# Altium PCB CT310高端控制盒核心板电路V1.3.PcbDoc (part 5 of 10)
Units mil, origin at the board's own origin, x right, y up, seen from the top; angles counter-clockwise.
Board outline 3735.76 x 4625 mil, 2 copper layers (TOP, BOTTOM), stack 10.4 mil thick; 198 components, 362 nets, 1085 pads, 352 vias.
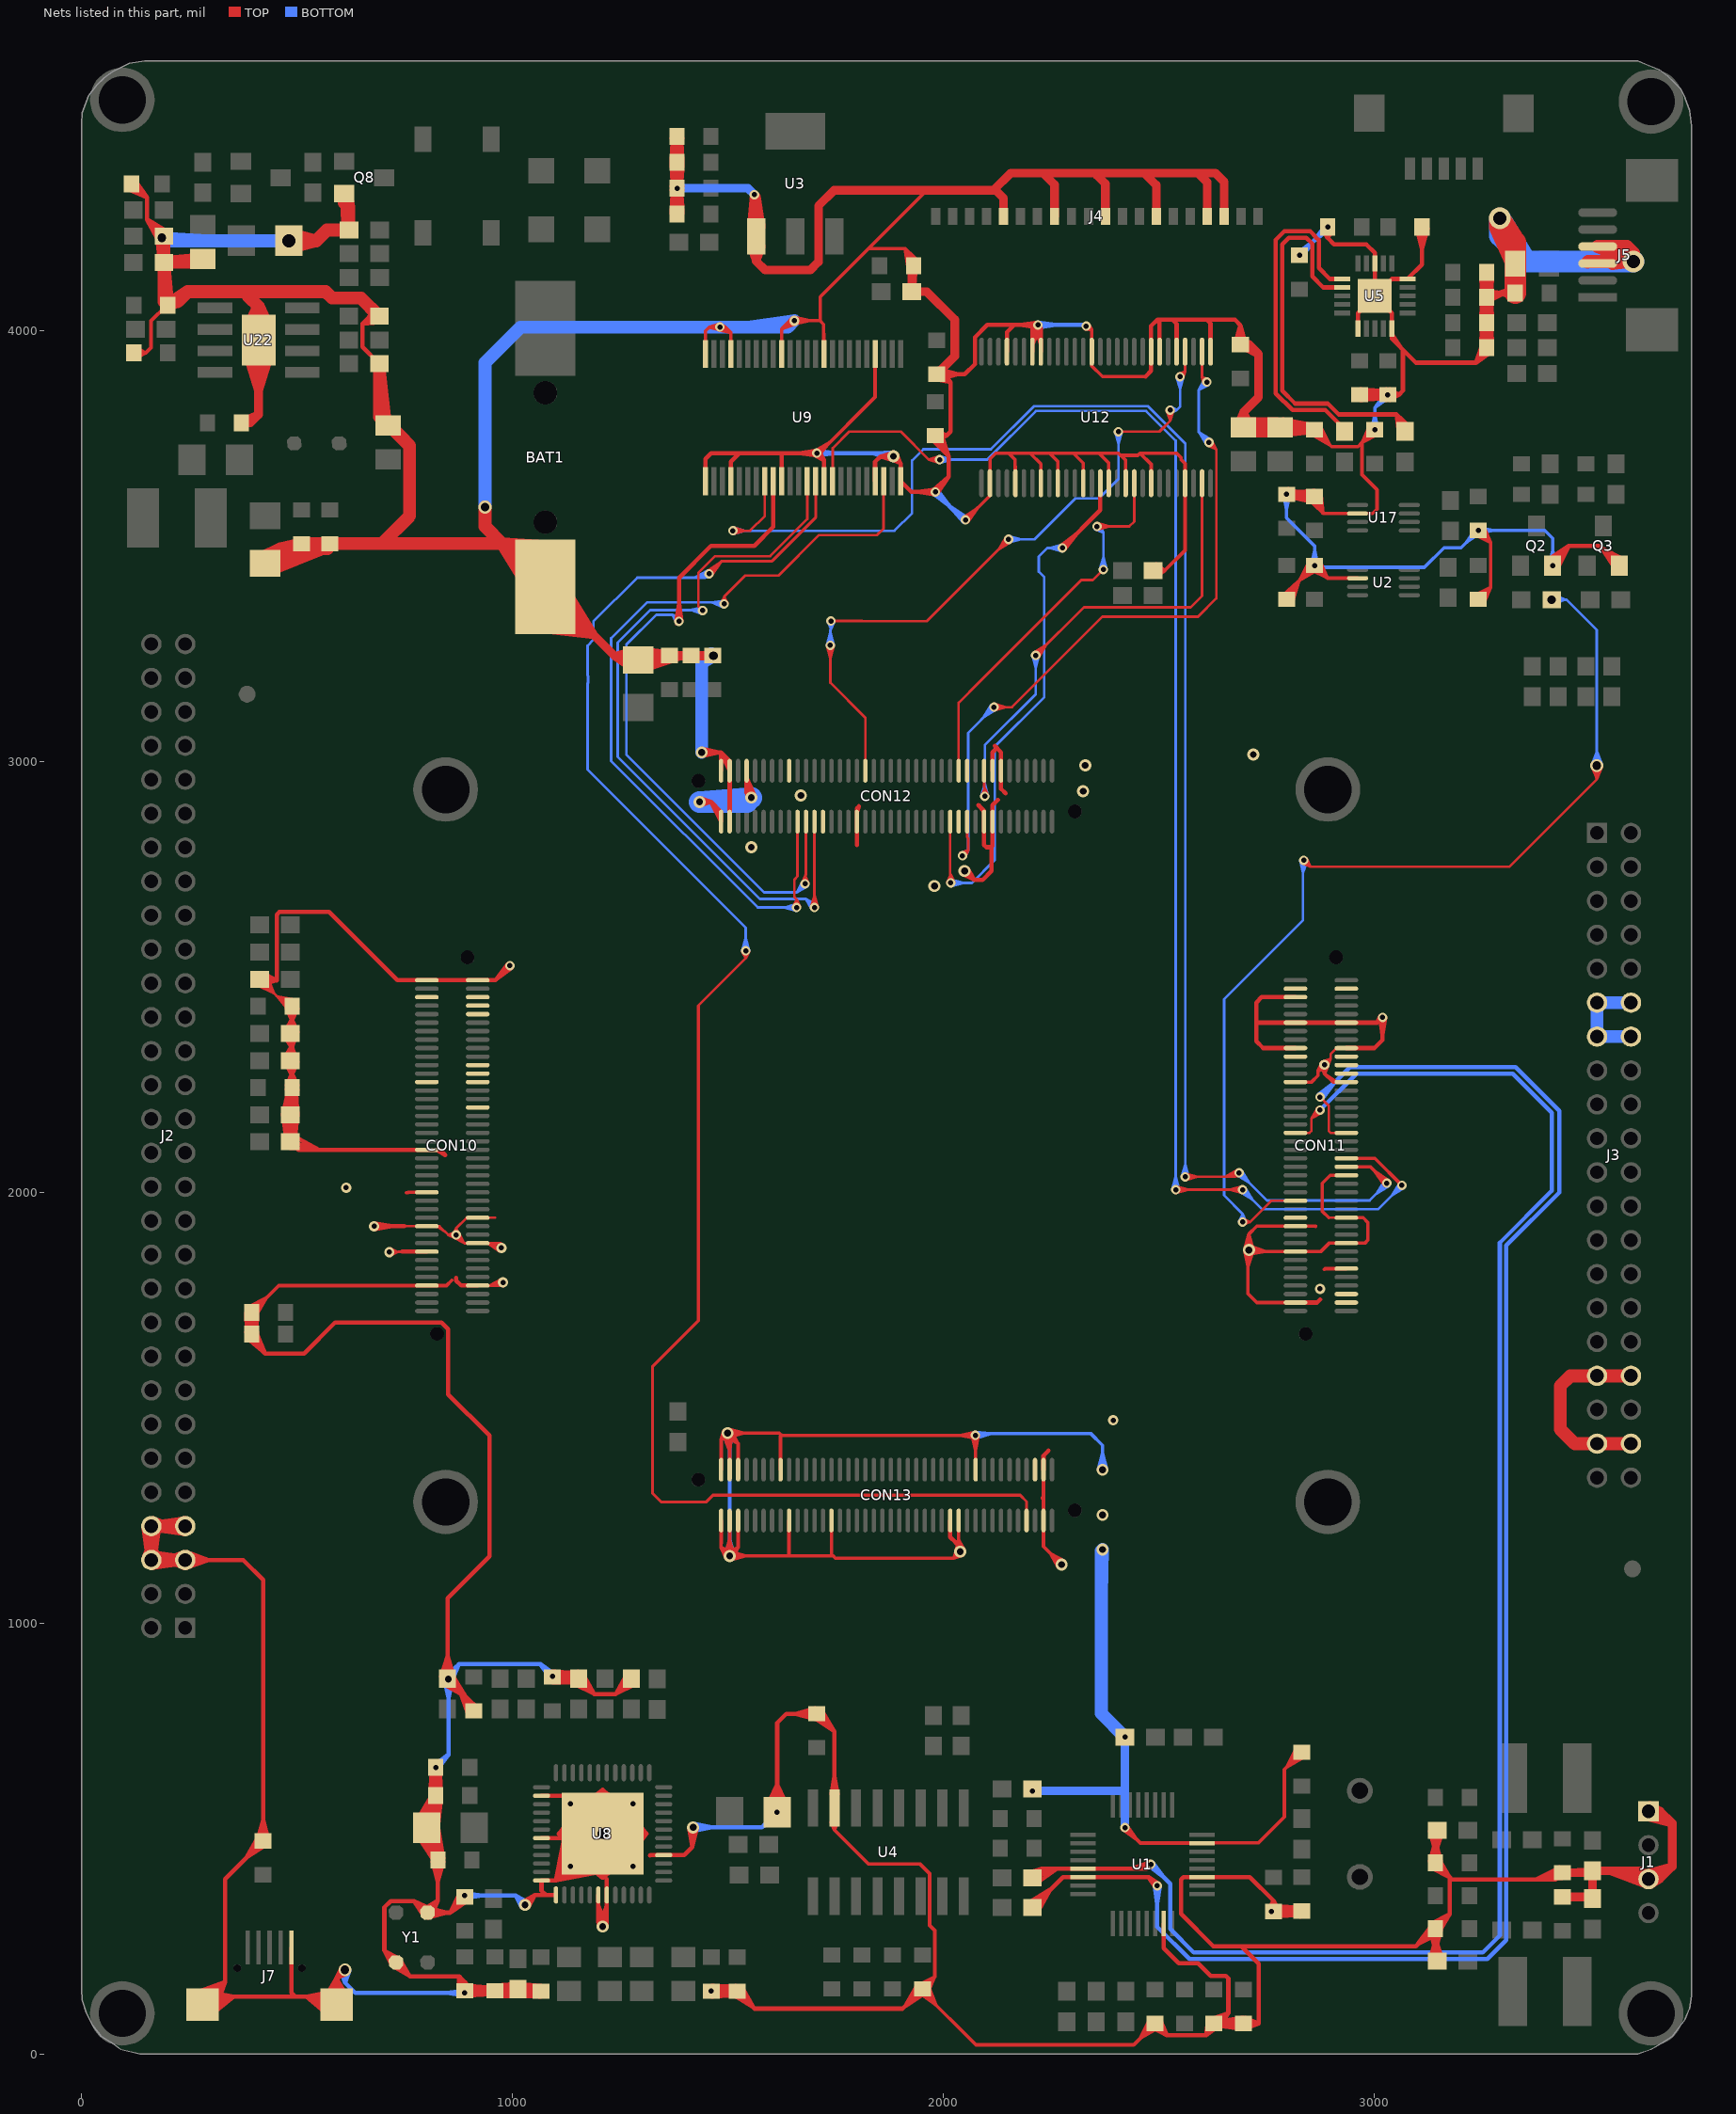
[diagram p5: the nets of this part, all layers, seen from the top]

## Via types
v1: diameter 22, hole 12, TOP to BOTTOM, tented both sides, 177 vias
v2: diameter 22, hole 12, TOP to BOTTOM, 89 vias
v3: diameter 28, hole 16, TOP to BOTTOM, 37 vias
v4: diameter 30, hole 20, TOP to BOTTOM, tented both sides, 26 vias
v5: diameter 24, hole 12, TOP to BOTTOM, 17 vias
v6: diameter 50, hole 30, TOP to BOTTOM, tented both sides, 5 vias
v7: diameter 40, hole 24, TOP to BOTTOM, 1 vias

## Nets (pads, with @x,y where several pads share a name; then routed paths per layer and width w, separated by ;. In a path a pad name is that pad's centre, name@x,y a point inside that pad or via, vN(x,y) a via of type N, cw(c..) or ccw(c..) an arc to the next point about the centre after c; other vN are vias at no path point) (continued)
GND: (continued)
  TOP w10: v2(1133.61,435.57) U8.49@1151.38,478.66 ; v2(1133.61,435.57) U8.49@1176.7,453.34 ; v2(1133.61,435.57) U8.49@1147.51,484.04 ; v2(1133.61,435.57) U8.49@1182.08,449.47 ; v2(1133.61,435.57) U8.49@1144.4,491.81 ; v2(1133.61,435.57) U8.49@1189.86,446.36 ; U8.49@1137.56,431.05 U8.49@1169.11,462.62 ; R45.2@1141.54,884.97 1091.52,882.39 R45.2@1141.54,884.97 ; R45.2@1141.86,873.41 1092.91,882.38 R45.2@1141.86,873.41 ; R45.2@1141.87,874.94 1092.37,870.43 R45.2@1141.87,874.94 ; R45.2@1141.87,874.94 1092.73,882.4 R45.2@1141.87,874.94 ; U8.49@1154.88,473.34 v7(1208.61,510.57) ; U8.49@1155.56,500.73 v7(1208.61,510.57) ; U8.49@1161.95,472.53 v7(1208.61,510.57) ; U8.49@1165.83,467.78 1138.13,431.62 U8.49@1165.83,467.78 ; U8.49@1165.83,467.78 1129.66,440.08 U8.49@1165.83,467.78 ; U8.49@1167.4,469.36 v7(1208.61,510.57) ; U8.49@1167.4,469.36 1196.73,519.72 U8.49@1167.4,469.36 ; U8.49@1167.4,469.36 1217.77,498.69 U8.49@1167.4,469.36 ; U8.49@1167.4,469.36 v7(1208.61,510.57) ; U8.49@1167.4,551.78 v7(1208.61,510.57) ; U8.49@1170.58,463.91 v7(1208.61,510.57) ; U8.49@1171.39,456.83 v7(1208.61,510.57) ; 1189.08,835 1238.86,835 ; 1198.77,344.4 v3(1208.61,295.57) ; v3(1208.61,295.57) 1218.46,344.4 ; 1319.4,461.36 U8.16@1350.35,461.36 1398.48,461.36 ; C44.1@1368.79,4326.34 v1(1381.39,4330) ; C44.1@1368.79,4326.34 C41.1@1381.39,4280.31 ; C44.1@1368.79,4333.66 v1(1381.39,4330) ; C44.1@1368.79,4333.66 C42.1@1381.39,4379.69 ; C41.1@1369.48,4289.11 v1(1381.39,4330) ; C42.1@1369.48,4370.89 v1(1381.39,4330) ; C41.1@1370.2,4277.77 v1(1381.39,4330) ; C41.1@1370.2,4277.77 C44.1@1387.18,4328.42 ; C42.1@1370.2,4382.23 v1(1381.39,4330) ; C42.1@1370.2,4382.23 C44.1@1387.18,4331.58 ; C44.1@1370.73,4319.24 C41.1@1381.39,4271.97 ; C44.1@1370.73,4340.76 C42.1@1381.39,4388.03 ; C43.1@1370.73,4439.24 C42.1@1381.39,4391.97 ; C41.1@1372.79,4288.29 v1(1381.39,4330) ; C41.1@1372.79,4288.29 1375.44,4330.79 C41.1@1372.79,4288.29 ; C41.1@1372.79,4288.29 C44.1@1387.17,4328.38 ; C41.1@1372.79,4288.29 v1(1381.39,4330) ; C41.1@1372.79,4288.29 C44.1@1387.17,4328.38 ; C42.1@1372.79,4371.71 v1(1381.39,4330) ; C42.1@1372.79,4371.71 C44.1@1387.17,4331.62 ; C42.1@1372.79,4371.71 1375.44,4329.21 C42.1@1372.79,4371.71 ; C42.1@1372.79,4371.71 v1(1381.39,4330) ; C42.1@1372.79,4371.71 C44.1@1387.17,4331.62 ; C44.1@1375.41,4329.56 C41.1@1381.39,4289 ; C44.1@1375.41,4329.56 C41.1@1381.39,4289 ; C44.1@1375.41,4329.56 C41.1@1381.39,4289 ; C44.1@1375.41,4329.56 C41.1@1381.39,4289 ; C44.1@1375.41,4330.44 C42.1@1381.39,4371 ; C44.1@1375.41,4330.44 C42.1@1381.39,4371 ; C44.1@1375.41,4330.44 C42.1@1381.39,4371 ; C44.1@1375.41,4330.44 C42.1@1381.39,4371 ; C44.1@1375.61,4328.38 C41.1@1389.99,4288.29 ; C44.1@1375.6,4328.42 C41.1@1392.58,4277.77 ; C44.1@1375.61,4328.38 C41.1@1389.99,4288.29 ; C44.1@1375.61,4331.62 C42.1@1389.99,4371.71 ; C44.1@1375.6,4331.58 C42.1@1392.58,4382.23 ; C44.1@1375.61,4331.62 C42.1@1389.99,4371.71 ; C41.1@1381.39,4271.97 v1(1381.39,4330) ; C41.1@1381.39,4271.97 1375.4,4329.69 C41.1@1381.39,4271.97 ; C41.1@1381.39,4271.97 1387.38,4329.69 C41.1@1381.39,4271.97 ; C41.1@1381.39,4271.97 v1(1381.39,4330) ; C41.1@1381.39,4271.97 C44.1@1381.39,4319.69 ; C41.1@1381.39,4271.97 C44.1@1392.05,4319.24 ; C41.1@1381.39,4271.97 C44.1@1381.39,4319.69 ; C41.1@1381.39,4280.31 v1(1381.39,4330) ; C41.1@1381.39,4280.31 1375.4,4329.64 C41.1@1381.39,4280.31 ; C41.1@1381.39,4280.31 1387.38,4329.64 C41.1@1381.39,4280.31 ; C41.1@1381.39,4280.31 v1(1381.39,4330) ; C41.1@1381.39,4280.31 C44.1@1393.99,4326.34 ; C41.1@1381.39,4289 v1(1381.39,4330) ; C41.1@1381.39,4289 C44.1@1387.37,4329.56 ; C41.1@1381.39,4289 v1(1381.39,4330) ; C41.1@1381.39,4289 C44.1@1387.37,4329.56 ; C41.1@1381.39,4289 v1(1381.39,4330) ; C41.1@1381.39,4289 C44.1@1387.37,4329.56 ; C41.1@1381.39,4289 C44.1@1387.37,4329.56 ; C44.1@1381.39,4319.69 1393.99,4273.66 C44.1@1381.39,4319.69 ; C44.1@1381.39,4319.69 1368.79,4273.66 C44.1@1381.39,4319.69 ; v1(1381.39,4330) C41.1@1389.99,4288.29 ; v1(1381.39,4330) C41.1@1392.58,4277.77 ; v1(1381.39,4330) C41.1@1393.3,4289.11 ; v1(1381.39,4330) C41.1@1389.99,4288.29 ; v1(1381.39,4330) C42.1@1381.39,4371 ; v1(1381.39,4330) C42.1@1389.99,4371.71 ; v1(1381.39,4330) C42.1@1381.39,4388.03 ; v1(1381.39,4330) C42.1@1393.3,4370.89 ; v1(1381.39,4330) C42.1@1381.39,4388.03 ; v1(1381.39,4330) C42.1@1392.58,4382.23 ; v1(1381.39,4330) C42.1@1381.39,4371 ; v1(1381.39,4330) C42.1@1389.99,4371.71 ; v1(1381.39,4330) C42.1@1381.39,4371 ; v1(1381.39,4330) C42.1@1381.39,4379.69 ; v1(1381.39,4330) C44.1@1393.99,4333.66 ; v1(1381.39,4330) C42.1@1381.39,4379.69 ; v1(1381.39,4330) C44.1@1393.99,4326.34 ; C44.1@1381.39,4340.31 C42.1@1381.39,4388.03 ; C44.1@1381.39,4340.31 1368.79,4386.34 C44.1@1381.39,4340.31 ; C44.1@1381.39,4340.31 1393.99,4386.34 C44.1@1381.39,4340.31 ; C44.1@1381.39,4340.31 C42.1@1381.39,4388.03 ; C42.1@1381.39,4371 C44.1@1387.37,4330.44 ; C42.1@1381.39,4371 C44.1@1387.37,4330.44 ; C42.1@1381.39,4371 C44.1@1387.37,4330.44 ; C42.1@1381.39,4371 C44.1@1387.37,4330.44 ; C42.1@1381.39,4379.69 1387.38,4330.36 C42.1@1381.39,4379.69 ; C42.1@1381.39,4379.69 1375.4,4330.36 C42.1@1381.39,4379.69 ; C42.1@1381.39,4379.69 C44.1@1393.99,4333.66 ; C42.1@1381.39,4388.03 1387.38,4330.31 C42.1@1381.39,4388.03 ; C42.1@1381.39,4388.03 1375.4,4330.31 C42.1@1381.39,4388.03 ; C42.1@1381.39,4388.03 C44.1@1392.05,4340.76 ; C42.1@1381.39,4391.97 C43.1@1381.39,4439.69 ; C42.1@1381.39,4391.97 C43.1@1392.05,4439.24 ; C42.1@1381.39,4391.97 C43.1@1381.39,4439.69 ; C43.1@1381.39,4439.69 1393.99,4393.66 C43.1@1381.39,4439.69 ; C43.1@1381.39,4439.69 1368.79,4393.66 C43.1@1381.39,4439.69 ; C41.1@1389.99,4288.29 1387.34,4330.79 C41.1@1389.99,4288.29 ; C42.1@1389.99,4371.71 1387.34,4329.21 C42.1@1389.99,4371.71 ; 1398.48,461.36 1417.12,480 1417.12,525.57 v3(1418.61,525.57) 1417.12,481.53 ; 1447.23,3701.47 1460.76,3715 1525.76,3715 ; 1460.52,2905.57 CON12.79@1483.73,2859.86 1483.73,2882.36 1460.52,2905.57 ; v1(1460.76,145.63) C39.2@1501.76,145.63 ; v1(1460.76,145.63) C28.1@1464.42,133.03 ; v1(1460.76,145.63) C39.2@1510.44,145.63 ; v1(1460.76,145.63) C28.1@1464.42,158.23 ; v1(1460.76,145.63) C39.2@1510.44,145.63 ; v1(1460.76,145.63) C39.2@1501.11,154.28 ; v1(1460.76,145.63) C28.1@1467.13,133.7 ; v1(1460.76,145.63) C39.2@1510,156.29 ; v1(1460.76,145.63) C28.1@1461.58,158.29 ; v1(1460.76,145.63) C39.2@1510,156.29 ; v1(1460.76,145.63) C39.2@1501.11,136.98 ; v1(1460.76,145.63) C28.1@1461.58,132.97 ; v1(1460.76,145.63) C39.2@1510,134.97 ; v1(1460.76,145.63) C28.1@1467.13,157.56 ; v1(1460.76,145.63) C39.2@1510,134.97 ; v1(1460.76,145.63) C39.2@1501.76,145.63 ; v1(1460.76,145.63) C28.1@1464.42,133.03 ; v1(1460.76,145.63) C39.2@1510.44,145.63 ; v1(1460.76,145.63) C28.1@1464.42,158.23 ; v1(1460.76,145.63) C39.2@1510.44,145.63 ; v1(1460.76,145.63) C39.2@1501.76,145.63 ; v1(1460.76,145.63) C39.2@1502.47,154.23 ; v1(1460.76,145.63) C39.2@1502.47,137.03 ; C28.1@1461.12,139.64 C39.2@1510.44,145.63 ; C28.1@1461.12,139.64 C39.2@1510.44,145.63 ; C28.1@1461.12,139.64 C39.2@1510.44,145.63 ; C28.1@1461.12,139.64 C39.2@1510.44,145.63 ; C28.1@1461.12,151.62 C39.2@1510.44,145.63 ; C28.1@1461.12,151.62 C39.2@1510.44,145.63 ; C28.1@1461.12,151.62 C39.2@1510.44,145.63 ; C28.1@1461.12,151.62 C39.2@1510.44,145.63 ; C28.1@1461.2,139.65 C39.2@1501.76,145.63 ; C28.1@1461.2,139.65 C39.2@1501.76,145.63 ; C28.1@1461.2,139.65 C39.2@1501.76,145.63 ; C28.1@1461.2,139.65 C39.2@1501.76,145.63 ; C28.1@1461.2,151.61 C39.2@1501.76,145.63 ; C28.1@1461.2,151.61 C39.2@1501.76,145.63 ; C28.1@1461.2,151.61 C39.2@1501.76,145.63 ; C28.1@1461.2,151.61 C39.2@1501.76,145.63 ; C28.1@1461.58,132.97 C39.2@1510,134.97 ; C28.1@1461.58,158.29 C39.2@1510,156.29 ; C28.1@1462.38,139.85 C39.2@1510,156.29 ; C28.1@1462.38,139.85 C39.2@1510,156.29 ; C28.1@1462.38,139.85 C39.2@1502.47,154.23 ; C28.1@1462.38,151.41 C39.2@1510,134.97 ; C28.1@1462.38,151.41 C39.2@1510,134.97 ; C28.1@1462.38,151.41 C39.2@1502.47,137.03 ; C28.1@1462.73,145.63 C39.2@1510.44,145.63 ; C28.1@1462.73,145.63 C39.2@1510,156.29 ; C28.1@1462.73,145.63 C39.2@1510,134.97 ; C28.1@1462.73,145.63 C39.2@1510.44,145.63 ; C28.1@1464.42,133.03 1455.53,142.68 C28.1@1464.42,133.03 ; C28.1@1464.42,133.03 1466.75,145.94 C28.1@1464.42,133.03 ; C28.1@1464.42,133.03 C39.2@1510.44,145.63 ; C28.1@1464.42,133.03 C39.2@1510.44,145.63 ; C28.1@1464.42,158.23 1466.75,145.32 C28.1@1464.42,158.23 ; C28.1@1464.42,158.23 1455.53,148.58 C28.1@1464.42,158.23 ; C28.1@1464.42,158.23 C39.2@1510.44,145.63 ; C28.1@1464.42,158.23 C39.2@1510.44,145.63 ; C28.1@1467.13,133.7 C39.2@1510,156.29 ; C28.1@1467.13,157.56 C39.2@1510,134.97 ; 1478.61,3020.57 1483.73,3015.45 ; 1478.61,3020.57 1483.33,3020.57 ; 1483.33,3020.57 CON12.78@1503.42,2977.98 ; 1483.33,3020.57 1503.42,3000.48 CON12.78@1503.42,2977.98 ; 1506.29,3695.53 1525.76,3715 ; C39.2@1510,134.97 1459.84,139.7 C39.2@1510,134.97 ; C39.2@1510,156.29 1459.84,151.56 C39.2@1510,156.29 ; 1525.76,3715 1620.76,3715 ; 1542.79,2926.39 CON12.74@1542.79,2955.48 ; 1542.79,2926.39 v3(1553.61,2915.57) ; CON12.74@1542.79,2955.48 v3(1553.61,2915.57) ; CON12.74@1542.79,2961.9 v3(1553.61,2915.57) ; 1611.39,603.97 v1(1613.73,560.57) ; v1(1613.73,560.57) 1613.73,601.57 ; v1(1613.73,560.57) 1616.07,603.97 ; 1613.73,601.57 1619.72,561.01 1613.73,601.57 ; 1613.73,601.57 1607.75,561.01 1613.73,601.57 ; 1620.76,3715 v1(1705.76,3715) 1722.82,3697.94 ; 1620.76,3715 1624.4,3711.35 ; 1798.69,2805.65 CON12.47@1798.69,2859.86 1798.69,2890.65 ; CON12.47@1798.69,2882.36 1798.69,2890.65 ; CON12.47@1798.69,2882.36 1803.61,2895.57 1798.69,2890.65 ; CON12.47@1798.69,2882.36 1798.69,2890.65 ; 1840.93,3695.17 1853.4,3707.64 ; 1853.4,3707.64 v3(1883.61,3707.64) 1900,3691.26 ; 1900,3691.26 U9.48@1900,3650 1925,3625 v1(1980.76,3625) ; 1939.76,3625 v1(1980.76,3625) ; v1(1980.76,3625) 2010.43,3658.67 ; C30.2@1997.49,3898.27 2015.76,3880 ; C30.2@1997.49,3898.27 2049.03,3898.27 2072.55,3921.79 2072.55,3984.03 2101.17,4012.64 2163.61,4012.64 ; 2006.39,3755.63 1982.73,3755.63 2010.34,3710.11 ; 2006.39,3755.63 2015.76,3765 2015.76,3880 ; 2015.76,3880 1985.58,3898.27 2033.3,3898.27 ; 2070.76,2725 v3(2048.61,2745.57) 2050.19,2745.57 2070.76,2725 ; 2070.76,2725 2090.76,2725 2110.76,2745 2110.76,2800.57 ; 2093.97,2805.21 2098.61,2800.57 2110.76,2800.57 ; 2110.76,2800.57 2113.65,2803.46 ; 2113.65,2803.46 CON12.15@2113.65,2859.86 2113.65,2898.36 ; 2133.34,2935.85 CON12.14@2133.34,2977.98 2133.34,3020.85 ; 2146.92,3995.95 2163.61,4012.64 ; 2163.61,4012.64 v1(2218.61,4012.64) ; 2205.76,4007.64 v1(2218.61,4012.64) ; 2205.76,4007.64 2205.98,4007.43 ; U12.50@2205.98,3967.5 v1(2218.61,4012.64) ; U12.50@2205.98,3977.68 v1(2218.61,4012.64) ; U12.50@2205.98,3977.68 2205.98,4007.43 ; 2205.98,4007.43 v1(2218.61,4012.64) ; 2205.98,4007.43 v1@2215.16,4017.55 ; 2205.98,4007.43 v1@2219.63,4006.73 ; 2205.98,4007.43 v1(2218.61,4012.64) ; 2205.98,4007.43 v1@2215.16,4017.55 ; 2205.98,4007.43 v1@2219.63,4006.73 ; 2205.98,4007.43 v1(2218.61,4012.64) ; 2205.98,4007.43 v1@2215.16,4017.55 ; 2205.98,4007.43 v1@2219.63,4006.73 ; v1(2218.61,4012.64) U12.49@2225.66,3968.58 ; v1(2218.61,4012.64) U12.49@2225.66,3977.68 ; v1(2218.61,4012.64) v1@2225.66,4005.6 ; U12.49@2225.66,3977.68 v1@2225.66,4005.6 ; 2481.57,3905.6 U12.36@2481.57,3950.52 2481.57,4010.19 ; 2481.57,4010.19 2496.07,4024.69 ; 2496.07,4024.69 2531.07,4024.69 ; 2510.78,244.98 2545.76,210 2590.76,210 2619.76,181 2654.76,181 2660.76,175 2660.76,95 ; 2518.48,42.91 2608.67,42.91 ; 2531.07,4024.69 2611.07,4024.69 ; 2556.23,410.47 2550.76,405 2550.76,325 2625.76,250 2690.76,250 ; 2556.23,410.47 U1.3@2599.36,410.47 2710.29,410.47 2765.76,355 ; 2608.67,42.91 2641.39,75.63 2660.76,95 ; 2611.07,4024.69 2676.07,4024.69 2688.61,4012.15 ; 2690.76,250 2731.39,209.37 2731.39,70.63 ; 2690.76,250 3095.76,250 3136.76,291 C18.2@3141.39,291 ; 2725.76,2395 2727.44,2393.32 CON11.12@2816.4,2393.32 CON11.11@2934.52,2393.32 3006.37,2393.32 ; v1(2760.76,330.63) 2801.76,330.95 ; v1(2760.76,330.63) C6.1@2769.54,318.04 ; v1(2760.76,330.63) C22.2@2815.45,331.08 ; v1(2760.76,330.63) C6.1@2769.3,343.25 ; v1(2760.76,330.63) C22.2@2815.45,331.08 ; v1(2760.76,330.63) 2801.5,337.66 ; v1(2760.76,330.63) C6.1@2766.77,343.31 ; v1(2760.76,330.63) C22.2@2815.76,340.62 ; v1(2760.76,330.63) 2801.55,324.29 ; v1(2760.76,330.63) C6.1@2767.03,317.93 ; v1(2760.76,330.63) C22.2@2815.74,321.63 ; v1(2760.76,330.63) 2801.76,330.63 ; v1(2760.76,330.63) C6.1@2769.42,318.03 ; v1(2760.76,330.63) C22.2@2815.44,330.63 ; v1(2760.76,330.63) C6.1@2769.42,343.23 ; v1(2760.76,330.63) C22.2@2815.44,330.63 ; v1(2760.76,330.63) 2801.76,330.63 ; v1(2760.76,330.63) 2765.76,355 ; v1(2760.76,330.63) 2765.76,355 ; 2765.76,355 2766.74,330.14 2765.76,355 ; 2765.76,355 2755.07,332.54 2765.76,355 ; C6.1@2766.77,343.31 C22.2@2815.76,340.62 ; C6.1@2767.03,317.93 C22.2@2815.74,321.63 ; C6.1@2767.73,330.63 C22.2@2815.45,331.08 ; C6.1@2767.73,330.63 C22.2@2815.76,340.62 ; C6.1@2767.73,330.63 C22.2@2815.74,321.63 ; C6.1@2767.73,330.63 C22.2@2815.44,330.63 ; C6.1@2769.3,343.25 C22.2@2815.45,331.08 ; C6.1@2769.42,318.03 C22.2@2815.44,330.63 ; C6.1@2769.42,343.23 C22.2@2815.44,330.63 ; C6.1@2769.54,318.04 C22.2@2815.45,331.08 ; 2801.76,330.63 2761.2,324.65 2801.76,330.63 ; 2801.76,330.63 2761.2,336.61 2801.76,330.63 ; C22.2@2815.44,330.63 2761.09,324.64 C22.2@2815.44,330.63 ; C22.2@2815.44,330.63 2761.09,336.62 C22.2@2815.44,330.63 ; C22.2@2815.45,331.08 2761.14,324.64 C22.2@2815.45,331.08 ; C22.2@2815.45,331.08 2761.04,336.62 C22.2@2815.45,331.08 ; C52.1@2879.14,4234.61 v1(2891.39,4240) ; C52.1@2879.14,4234.61 2891.39,4214.37 ; C52.1@2885.43,4239.3 2891.39,4214.37 ; C52.1@2885.43,4239.3 2891.39,4214.37 ; C52.1@2885.43,4239.3 2891.39,4214.37 ; C52.1@2885.43,4239.3 2891.39,4214.37 ; 2891.39,4214.37 v1(2891.39,4240) ; 2891.39,4214.37 C52.1@2897.35,4239.3 ; 2891.39,4214.37 v1(2891.39,4240) ; 2891.39,4214.37 C52.1@2897.35,4239.3 ; 2891.39,4214.37 v1(2891.39,4240) ; 2891.39,4214.37 C52.1@2897.35,4239.3 ; 2891.39,4214.37 C52.1@2897.35,4239.3 ; 2891.39,4214.37 C52.1@2903.64,4234.61 ; 2891.39,4214.37 v1(2891.39,4240) ; 2891.39,4214.37 2905.76,4200 2980.76,4200 3000.76,4180 ; v1(2891.39,4240) C52.1@2903.64,4234.61 ; U5.21@2961.39,4040.63 U5.21@3000.76,4080 ; C46.1@2967.73,3850.63 C51.1@3015.45,3850.63 ; C46.1@2967.73,3850.63 C51.1@3015.75,3860.13 ; C46.1@2967.73,3850.63 C51.1@3015.75,3841.13 ; C46.1@2967.73,3850.63 C51.1@3015.45,3850.63 ; C46.1@2981.08,3850.63 v1(3030.76,3850.63) ; C46.1@2981.08,3850.63 3030.4,3856.62 C46.1@2981.08,3850.63 ; C46.1@2981.08,3850.63 3030.4,3844.64 C46.1@2981.08,3850.63 ; C46.1@2981.08,3850.63 v1(3030.76,3850.63) ; C46.1@2981.08,3850.63 C51.1@3027.1,3863.23 ; C46.1@2981.08,3850.63 C51.1@3027.1,3838.03 ; 2988.87,3843.35 v1(3030.76,3850.63) ; 2988.87,3843.35 3029.32,3856.45 2988.87,3843.35 ; 2988.87,3843.35 3031.37,3844.66 2988.87,3843.35 ; 2988.87,3843.35 v1(3030.76,3850.63) ; 2988.87,3857.91 v1(3030.76,3850.63) ; 2988.87,3857.91 3031.37,3856.6 2988.87,3857.91 ; 2988.87,3857.91 3029.32,3844.81 2988.87,3857.91 ; 2988.87,3857.91 v1(3030.76,3850.63) ; 2989.76,3850.63 v1(3030.76,3850.63) ; 2989.76,3850.63 C51.1@3030.32,3856.61 ; 2989.76,3850.63 C51.1@3030.32,3844.65 ; 2989.76,3850.63 C51.1@3030.32,3856.61 ; 2989.76,3850.63 C51.1@3030.32,3844.65 ; 2989.76,3850.63 C51.1@3030.32,3856.61 ; 2989.76,3850.63 C51.1@3030.32,3844.65 ; 2989.76,3850.63 C51.1@3030.32,3856.61 ; 2989.76,3850.63 C51.1@3030.32,3844.65 ; U5.21@3000.76,4080 U5.21@3040.13,4119.37 ; U5.21@3000.76,4080 U5.18@3000.76,4155.79 3000.76,4180 ; U5.21@3000.76,4080 U5.21@3040.13,4040.63 ; C51.1@3015.45,3850.63 C51.1@3029.59,3856.51 ; C51.1@3015.45,3850.63 C51.1@3029.59,3844.75 ; C51.1@3015.45,3850.63 v1(3030.76,3850.63) ; C51.1@3015.45,3850.63 C51.1@3029.59,3856.51 ; C51.1@3015.45,3850.63 C51.1@3029.59,3844.75 ; C51.1@3015.45,3850.63 v1(3030.76,3850.63) ; C51.1@3015.45,3850.63 C51.1@3029.59,3856.51 ; C51.1@3015.45,3850.63 C51.1@3029.59,3844.75 ; C51.1@3015.45,3850.63 C51.1@3029.59,3856.51 ; C51.1@3015.45,3850.63 C51.1@3029.59,3844.75 ; C51.1@3015.45,3850.63 v1(3030.76,3850.63) ; C51.1@3015.45,3850.63 C51.1@3029.59,3856.51 ; C51.1@3015.45,3850.63 C51.1@3029.59,3844.75 ; C51.1@3015.45,3850.63 v1(3030.76,3850.63) ; C51.1@3015.45,3850.63 C51.1@3029.59,3856.51 ; C51.1@3015.45,3850.63 C51.1@3029.59,3844.75 ; C51.1@3015.45,3850.63 2969.42,3838.03 C51.1@3015.45,3850.63 ; C51.1@3015.45,3850.63 2969.42,3863.23 C51.1@3015.45,3850.63 ; C51.1@3027.1,3838.03 v1(3030.76,3850.63) ; C51.1@3027.1,3863.23 v1(3030.76,3850.63) ; v1(3030.76,3850.63) 3056.39,3850.63 ; v1(3030.76,3850.63) C51.1@3036.15,3838.38 ; v1(3030.76,3850.63) 3056.39,3850.63 ; v1(3030.76,3850.63) C51.1@3036.15,3862.88 ; v1(3030.76,3850.63) 3056.39,3850.63 ; v1(3030.76,3850.63) 3056.39,3850.63 ; C51.1@3031.46,3844.67 3056.39,3850.63 ; C51.1@3031.46,3844.67 3056.39,3850.63 ; C51.1@3031.46,3844.67 3056.39,3850.63 ; C51.1@3031.46,3844.67 3056.39,3850.63 ; C51.1@3031.46,3856.59 3056.39,3850.63 ; C51.1@3031.46,3856.59 3056.39,3850.63 ; C51.1@3031.46,3856.59 3056.39,3850.63 ; C51.1@3031.46,3856.59 3056.39,3850.63 ; C51.1@3036.15,3838.38 3056.39,3850.63 ; C51.1@3036.15,3862.88 3056.39,3850.63 ; 3040.13,3980.63 U5.10@3040.13,3991.42 ; 3040.13,3980.63 U5.10@3040.13,3991.42 ; 3040.13,3980.63 3065.76,3955 ; 3040.13,3980.63 U5.10@3040.13,4004.21 U5.21@3040.13,4040.63 ; 3056.39,3850.63 3065.76,3860 3065.76,3955 ; 3065.76,3955 3095.76,3925 3235.76,3925 ; 3100.97,255.22 3141.39,289.03 3141.39,241.31 ; C18.2@3141.39,291 3174.39,324 ; 3174.39,324 3174.39,410 ; 3235.76,3925 3260.13,3949.37 C55.1@3260.13,4086.67 ; C48.1@3249.05,4009.09 C47.1@3260.13,3961.97 ; C55.1@3249.05,4067.43 C48.1@3260.13,4020.3 ; C55.1@3249.05,4085.91 C54.1@3260.13,4133.03 ; C47.1@3260.13,3961.97 C48.1@3271.21,4009.09 ; C47.1@3260.13,3961.97 C48.1@3260.13,4009.69 ; C47.1@3260.13,3961.97 C48.1@3260.13,4009.69 ; C48.1@3260.13,4009.69 3272.73,3963.66 C48.1@3260.13,4009.69 ; C48.1@3260.13,4009.69 3247.53,3963.66 C48.1@3260.13,4009.69 ; C48.1@3260.13,4020.3 C55.1@3271.21,4067.43 ; C48.1@3260.13,4020.3 C55.1@3260.13,4068.02 ; C48.1@3260.13,4020.3 C55.1@3260.13,4068.02 ; C55.1@3260.13,4068.02 3272.73,4022 C55.1@3260.13,4068.02 ; C55.1@3260.13,4068.02 3247.53,4022 C55.1@3260.13,4068.02 ; C55.1@3260.13,4085.31 C54.1@3260.13,4133.03 ; C55.1@3260.13,4086.67 C54.1@3260.13,4133.03 ; C54.1@3260.13,4133.03 C55.1@3271.21,4085.91 ; v1(3413.26,3453.75) 3440.7,3488.65 ; v1(3413.26,3453.75) Q2.2@3425.42,3449.46 ; v1(3413.26,3453.75) 3445.22,3488.94 ; v1(3413.26,3453.75) 3440.98,3490.22 ; v1(3413.26,3453.75) 3413.26,3462.5 3450.76,3500 ; Q2.2@3425.42,3449.46 3450.76,3500
  TOP w20: C154.2@370.13,3786.97 410.19,3804.43 ; U22.9@381.14,3953.33 410.19,3858.3 ; U22.9@410.19,3957.67 410.19,3858.3 ; U22.9@410.19,3977.35 410.19,3804.43 ; U22.9@439.24,3953.33 410.19,3858.3 ; BAT1.2@1055.41,3308.56 1188.19,3292.57 ; BAT1.2@1059.37,3328.51 1188.19,3292.57 ; BAT1.2@1066.22,3347.42 1188.19,3292.57 ; BAT1.2@1075.76,3365 1188.19,3292.57 ; BAT1.2@1075.76,3405 1236.82,3243.94 ; BAT1.2@1087.82,3380.96 1188.19,3292.57 ; BAT1.2@1102.21,3395.01 1188.19,3292.57 ; BAT1.2@1118.74,3406.87 1188.19,3292.57 ; C118.2@1278.69,3215.22 1236.82,3243.94 ; C118.2@1285.99,3256.6 1236.82,3243.94 ; C118.2@1286.82,3235.12 1236.82,3243.94 ; C118.2@1290.76,3235.12 C118.2@1299.58,3243.94 ; C118.2@1294.89,3256.61 C130.2@1361.65,3245.26 ; C118.2@1294.94,3256.61 1386.15,3244.82 ; C118.2@1295.15,3256.61 1387.1,3243.94 ; C118.2@1295.74,3256.59 1334.4,3243.94 ; C118.2@1299.2,3214.1 1387.1,3243.94 ; C118.2@1299.45,3214.15 1386.15,3244.82 ; C118.2@1301.25,3214.64 C130.2@1361.65,3245.26 ; C118.2@1304.74,3216.11 1334.4,3243.94 ; C42.1@1375.76,4402.13 v1(1381.39,4330) ; C42.1@1376.43,4400.85 v1(1381.39,4330) ; 1390.73,3243.94 v4(1465.76,3245) ; 1390.76,3244.04 v4(1465.76,3245) ; 1390.76,3245.26 v4(1465.76,3245) ; U3.1@1553.59,4239.57 v1@1565.21,4310.55 ; U3.1@1553.7,4195.43 1565.21,4160.55 ; U3.1@1554.14,4242.9 v1(1560.76,4315) ; U3.1@1565.21,4197.28 1565.21,4160.55 ; U3.1@1565.21,4238.62 v1@1565.21,4310.55 ; U3.1@1565.21,4242.9 v1(1560.76,4315) ; U3.1@1565.21,4242.97 v1(1560.76,4315) ; U3.1@1576.01,4244.55 v1(1560.76,4315) ; U3.1@1576.71,4195.43 1565.21,4160.55 ; U3.1@1576.82,4239.57 v1@1565.21,4310.55 ; R26.1@1928.16,4090 1960.76,4090 ; C150.2@1930.13,4148.03 R26.1@1926.19,4090 ; C150.2@1930.13,4150 1926.19,4146.06 R26.1@1926.19,4090 ; C30.2@1983.61,3898.27 2025.76,3940.42 ; C30.2@1985.58,3898.27 2025.76,3940.42 ; J4.16@2139.22,4265 2139.22,4306.54 ; J4.16@2139.22,4273.86 2139.22,4306.54 ; 2235.76,4360 2257.33,4338.43 ; J4.13@2257.33,4265 2257.33,4338.43 ; J4.13@2257.33,4273.86 2257.33,4338.43 ; 2355.76,4360 2375.44,4340.31 ; J4.10@2375.44,4265 2375.44,4340.31 ; J4.10@2375.44,4273.86 2375.44,4340.31 ; 2470.76,4360 2493.56,4337.2 ; J4.7@2493.56,4265 2493.56,4337.2 ; J4.7@2493.56,4273.86 2493.56,4337.2 ; J4.4@2611.67,4265 2611.67,4344.09 ; J4.4@2611.67,4273.86 2611.67,4344.09 ; J4.3@2651.04,4265 2651.04,4344.72 ; J4.3@2651.04,4273.86 2651.04,4344.69 ; C59.2@2682.4,3777.95 2695.76,3810 ; C60.2@2688.61,3967.01 2708.75,3967.01 ; C59.2@2700.4,3761.71 C56.2@2773.68,3761.7 ; C59.2@2700.4,3788.84 C56.2@2773.68,3788.85 ; C59.2@2702.84,3761.7 C56.2@2780.76,3775.28 ; C59.2@2702.84,3788.85 C56.2@2780.76,3775.28 ; C59.2@2702.93,3761.71 C56.2@2774.85,3775.28 ; C59.2@2702.93,3788.84 C56.2@2774.85,3775.28 ; C59.2@2705.42,3762.18 C56.2@2773.68,3788.85 ; C59.2@2705.42,3788.37 C56.2@2773.68,3761.7 ; C59.2@2709.12,3777.95 2695.76,3810 ; C149.2@2860.76,3769.37 C149.2@2854.85,3775.28 ; J1.3@3630.69,418.27 3690.76,435 ; J1.1@3630.94,550.37 3690.76,535 ; J1.3@3631.91,392.56 3547.51,424.57 ; J1.3@3637.6,419.13 3547.51,424.57 ; J1.1@3643.26,574.48 3690.76,535 ; J1.3@3643.45,394.39 3690.76,435 ; 390.76,3785 C154.2@370.13,3785 390.76,3785 ; 390.76,3785 410.19,3804.43 ; 1236.82,3243.94 C118.2@1299.58,3243.94 ; C118.2@1294.7,3235.12 C130.2@1361.65,3245.26 ; C118.2@1294.7,3235.12 1387.1,3243.94 ; C118.2@1294.7,3235.12 1334.4,3243.94 ; C118.2@1294.7,3235.12 1386.15,3244.82 ; C118.2@1299.58,3243.94 C130.2@1361.65,3245.26 ; C118.2@1299.58,3243.94 1464.61,3243.94 C129.2@1416.08,3245.26 ; 1334.4,3243.94 C129.2@1412.15,3245.26 ; C130.2@1365.58,3245.26 v4(1465.76,3245) ; C130.2@1365.58,3245.26 C129.2@1412.15,3245.26 ; C130.2@1365.58,3245.26 C129.2@1412.15,3245.26 ; C130.2@1365.58,3245.26 C129.2@1412.15,3245.26 ; C130.2@1365.58,3245.26 1443.33,3243.94 ; C130.2@1365.58,3245.26 1384.89,3243.94 ; C130.2@1365.58,3245.26 C128.2@1462.65,3245.26 ; C41.1@1375.76,4275.63 v1(1381.39,4330) ; C41.1@1375.76,4275.63 v1(1381.39,4330) ; C41.1@1375.76,4275.63 1381.39,4328.03 C41.1@1381.39,4271.97 ; C41.1@1375.76,4275.63 1375.76,4450 C42.1@1381.39,4391.97 ; C41.1@1381.39,4271.97 v1(1381.39,4330) ; C41.1@1381.39,4271.97 v1(1381.39,4330) ; C41.1@1381.39,4271.97 1375.76,4350.55 v1(1381.39,4330) ; v1(1381.39,4330) C42.1@1381.39,4388.03 ; v1(1381.39,4330) 1375.76,4309.77 C42.1@1381.39,4388.03 ; v1(1381.39,4330) C42.1@1381.39,4388.03 ; C42.1@1381.39,4388.03 1375.76,4369.69 1381.39,4448.03 C42.1@1381.39,4391.97 ; C42.1@1381.39,4388.03 1381.39,4331.97 1375.76,4410.24 C42.1@1381.39,4391.97 ; 1384.89,3243.94 C129.2@1412.15,3245.26 ; 1384.89,3243.94 C129.2@1412.15,3245.26 ; 1384.89,3243.94 C128.2@1462.65,3245.26 ; C129.2@1416.08,3245.26 v4(1465.76,3245) ; C129.2@1416.08,3245.26 v4(1465.76,3245) ; C129.2@1416.08,3245.26 v4(1465.76,3245) ; C129.2@1416.08,3245.26 v4(1465.76,3245) ; C129.2@1416.08,3245.26 1443.33,3243.94 ; C129.2@1416.08,3245.26 C128.2@1462.65,3245.26 ; C129.2@1416.08,3245.26 C128.2@1462.65,3245.26 ; 1443.33,3243.94 v4(1465.76,3245) ; 1443.33,3243.94 v4(1465.76,3245) ; v1(1560.76,4315) v1@1565.21,4310.55 ; 1565.21,4160.55 U3.1@1565.21,4217.95 v1@1565.21,4310.55 ; 1565.21,4160.55 1585.76,4140 1690.76,4140 1709.66,4158.9 1709.66,4288.9 1745.76,4325 1960.76,4325 2115.76,4325 ; R26.1@1926.19,4090 1960.76,4090 ; 1960.76,4090 2025.76,4025 2025.76,3940.42 ; 2115.76,4325 2155.76,4365 2590.76,4365 ; 2115.76,4325 2120.76,4325 2139.22,4306.54 ; 2590.76,4365 2611.67,4344.09 ; 2590.76,4365 2630.76,4365 2651.04,4344.72 ; C60.2@2690.58,3967.01 2708.75,3967.01 ; C60.2@2690.58,3967.01 2730.76,3945 ; C60.2@2690.58,3967.01 2708.75,3967.01 ; C59.2@2695.76,3775.28 C56.2@2774.85,3775.28 ; C59.2@2695.76,3775.28 C56.2@2773.68,3788.85 ; C59.2@2695.76,3775.28 C56.2@2773.68,3761.7 ; C59.2@2695.76,3775.28 C56.2@2780.76,3775.28 ; C59.2@2695.76,3775.28 2695.76,3810 ; 2695.76,3810 2730.76,3845 2730.76,3945 ; C59.2@2701.67,3775.28 C56.2@2774.85,3775.28 ; C59.2@2701.67,3775.28 C56.2@2773.68,3788.85 ; C59.2@2701.67,3775.28 C56.2@2773.68,3761.7 ; C59.2@2701.67,3775.28 C56.2@2780.76,3775.28 ; 2708.75,3967.01 2730.76,3945 ; C56.2@2780.76,3775.28 C149.2@2858.79,3769.37 ; C56.2@2780.76,3775.28 C149.2@2854.85,3775.28 ; C149.2@2854.85,3775.28 2786.67,3775.28 C149.2@2858.79,3769.37 ; C149.2@2854.85,3775.28 2788.03,3761.72 C149.2@2858.79,3769.37 ; C149.2@2854.85,3775.28 2788.03,3788.83 C149.2@2858.79,3769.37 ; R14.1@3501.82,364.37 3437.73,364.37 R14.1@3505.76,362.4 ; R14.1@3501.82,364.37 R14.1@3505.76,360.43 ; R14.1@3501.82,364.37 C17.2@3435.76,364.37 R14.1@3505.76,362.4 ; R32.2@3501.82,420.63 3437.73,420.63 R32.2@3505.76,422.6 ; R32.2@3501.82,420.63 C20.2@3435.76,420.63 R32.2@3505.76,422.6 ; R32.2@3501.82,420.63 R32.2@3505.76,424.57 ; R14.1@3505.76,360.43 R32.2@3505.76,422.6 ; R14.1@3505.76,360.43 R32.2@3505.76,424.57 ; R14.1@3505.76,362.4 R32.2@3505.76,422.6 ; R14.1@3505.76,362.4 R32.2@3505.76,424.57 ; R32.2@3505.76,424.57 3616.82,424.57 J1.3@3635.76,405.63 ; 3547.51,424.57 J1.3@3635.76,405.63 ; J1.3@3635.76,405.63 3661.39,405.63 ; J1.3@3635.76,405.63 3690.76,435 ; J1.3@3635.76,405.63 3661.39,405.63 ; J1.1@3635.76,563.11 3662.65,563.11 ; J1.1@3635.76,563.11 3690.76,535 ; J1.1@3635.76,563.11 3662.65,563.11 ; 3661.39,405.63 3639.38,392.5 3661.39,405.63 ; 3661.39,405.63 3639.38,418.76 3661.39,405.63 ; 3661.39,405.63 3690.76,435 ; 3662.65,563.11 3639.21,549.93 3662.65,563.11 ; 3662.65,563.11 3639.21,576.29 3662.65,563.11 ; 3662.65,563.11 3690.76,535 ; 3690.76,435 3690.76,535
  TOP w30: v4(185.76,4215) R4.1@190.62,4157.85 ; R5.1@190.62,4218.57 R4.1@190.62,4157.85 ; C62.2@295.19,4168.48 C62.2@284.56,4157.85 ; U22.9@386.35,4002.11 410.19,4055.57 ; 386.59,4079.17 410.19,4055.57 ; U22.9@410.19,3977.35 410.19,4055.57 ; U22.9@410.19,3997.04 410.19,4055.57 ; C1.2@425.19,3457.74 460.94,3493.48 ; U22.9@434.03,4002.11 410.19,4055.57 ; C61.2@482.46,4191.5 543.61,4207.85 ; C61.2@482.46,4224.21 543.61,4207.85 ; C2.2@575.19,3505 696.26,3505 ; C2.2@577.16,3504.69 684.88,3505 ; Q8.2@609.19,4317.5 609.19,4295.85 620.01,4285.04 ; R135.2@688.65,4032.85 647.89,4075 ; R133.2@690.62,3906.69 C93.2@704.85,3779.37 ; R133.2@690.62,3922.85 690.62,3799.51 C93.2@710.76,3779.37 713.45,3779.37 760.76,3732.06 ; R135.2@690.62,4032.85 690.04,4032.85 647.89,4075 ; C93.2@716.67,3779.37 760.76,3732.06 ; v4(935.76,3590) 935.76,3545 975.76,3505 ; BAT1.2@1037.14,3405.84 975.76,3505 ; BAT1.2@1060.67,3425.06 975.76,3505 ; BAT1.2@1075.76,3405 975.76,3505 ; BAT1.2@1075.76,3445 975.76,3505 ; BAT1.2@1086.25,3467.69 975.76,3505 ; BAT1.2@1092.14,3497.5 975.76,3505 ; J5.3@3494.58,4158.67 3495.9,4160 v6(3600.76,4160) ; J5.3@3552.77,4155.32 v6(3600.76,4160) ; J3.38@3595.13,1416.13 J3.37@3516.39,1416.13 3464.63,1416.13 3430.76,1450 3430.76,1550 3454.37,1573.61 J3.33@3516.39,1573.61 J3.34@3595.13,1573.61 ; R4.1@190.62,4157.85 274.85,4165.63 192.59,4157.85 C62.2@284.56,4157.85 ; R4.1@190.62,4157.85 C95.2@199.56,4059.82 ; R4.1@190.62,4157.85 190.62,4066.79 208.5,4066.79 222.55,4066.79 ; R4.1@190.62,4157.85 C62.2@284.56,4157.85 ; C95.2@199.56,4059.82 222.55,4066.79 ; C95.2@199.56,4059.82 222.55,4066.79 ; C95.2@199.56,4059.82 245.76,4090 ; 222.55,4066.79 245.76,4090 ; 245.76,4090 565.76,4090 580.76,4075 647.89,4075 ; C1.2@429.13,3459.41 C3.2@508.22,3504.69 ; C1.2@429.13,3459.41 460.94,3493.48 ; C1.2@429.13,3459.41 460.94,3493.48 ; C1.2@429.13,3459.41 C2.2@558.99,3493.48 ; 460.94,3493.48 C3.2@508.22,3504.69 ; 460.94,3493.48 442.99,3450.46 460.94,3493.48 ; 460.94,3493.48 419.25,3472.62 460.94,3493.48 ; 460.94,3493.48 570.19,3493.48 C3.2@512.16,3504.69 ; v6(480.31,4207.85) 543.61,4207.85 ; v6(480.31,4207.85) 543.61,4207.85 ; v6(480.31,4207.85) 543.61,4207.85 ; C3.2@508.22,3504.69 465.96,3469.07 C2.2@573.22,3504.69 ; C3.2@508.22,3504.69 471.31,3458.51 C2.2@573.22,3504.69 ; C3.2@508.22,3504.69 461.72,3480.4 C2.2@573.22,3504.69 ; C3.2@508.22,3504.69 462.82,3493.48 C2.2@573.22,3504.69 ; C3.2@508.22,3504.69 434.28,3443.74 C2.2@558.99,3493.48 ; C3.2@508.22,3504.69 425.93,3475.59 C2.2@558.99,3493.48 ; C3.2@512.16,3504.69 C2.2@573.22,3504.69 ; C3.2@512.16,3504.69 C2.2@573.22,3504.69 ; C3.2@512.16,3504.69 C2.2@573.22,3504.69 ; C3.2@512.16,3504.69 C2.2@573.22,3504.69 ; C3.2@512.16,3504.69 C2.2@558.99,3493.48 ; C3.2@512.16,3504.69 C2.2@558.99,3493.48 ; C3.2@512.16,3504.69 C2.2@558.99,3493.48 ; 543.61,4207.85 568.61,4232.85 ; 568.61,4232.85 618.04,4232.85 Q8.2@613.13,4317.5 ; 568.61,4232.85 R11.2@620.01,4232.85 ; Q8.2@613.13,4317.5 620.01,4285.04 ; Q8.2@613.13,4317.5 R11.2@620.01,4232.85 ; Q8.2@613.13,4317.5 620.01,4285.04 ; R11.2@620.01,4232.85 620.01,4285.04 ; 696.26,3505 975.76,3505 ; 696.26,3505 760.76,3569.5 760.76,3732.06 ; 3586.07,4194.69 v6(3600.76,4160) ; 3586.07,4194.69 v6(3600.76,4160) ; 3586.07,4194.69 v6(3600.76,4160) ; 3586.07,4194.69 3552.77,4194.69 v6(3600.76,4160) ; 3586.07,4194.69 3600.76,4180 v6(3600.76,4160) ; 3586.07,4194.69 J5.4@3517.77,4194.69 v6(3600.76,4160)
  TOP w50: v6@3290.76,4240 C50.1@3326.39,4160.75 ; v6@3290.76,4240 v6(3290.76,4260) ; v6@3290.76,4240 3326.39,4204.37 ; v6(3290.76,4260) C50.1@3326.39,4160.75 ; v6(3290.76,4260) 3326.39,4204.37 ; C50.1@3326.39,4154.84 3326.39,4088.64 3326.39,4148.94 C49.1@3326.39,4086.67 C50.1@3326.39,4154.84 ; C50.1@3326.39,4154.84 3326.39,4204.37 ; C50.1@3326.39,4160.75 3326.39,4204.37 ; C50.1@3326.39,4160.75 3326.39,4204.37
  BOTTOM w8: v3@1488.93,1438.06 1503.61,1401.39 ; v3@1493.7,1156.89 1503.61,1193.57 v3@1513.53,1156.89 ; v3(1503.61,1155.57) 1503.61,1435.57 v3(1498.61,1440.57) 1503.61,1401.39 ; v3@1508.61,1440.57 1503.61,1401.39 ; v1@2073.43,1442.57 2109.87,1440 ; v1@2075.12,1428.74 2109.87,1440 ; v3@2358.7,1356.89 2368.61,1393.57 v3@2378.53,1356.89 ; v3(2368.61,1355.57) 2368.61,1412.15 2340.76,1440 2078.04,1440 v1(2073.61,1435.57) 2109.87,1440 ; 2420.33,610.43 2420.76,610.87 ; v1@2788.8,3619.3 2795.76,3585 v1@2802.72,3619.3 ; v1(2795.76,3620) 2795.76,3565 2860.76,3500 v1(2860.76,3454.37) 2865.13,3450 3115.76,3450 3161.39,3495.63 3200.76,3495.63 v1(3240.76,3535.63) 3395.13,3535.63 3413.26,3517.5 v1(3413.26,3453.75) ; v1@2853.8,3455.07 2860.76,3489.37 v1@2867.72,3455.07 ; v1@2993.8,3770.07 3000.76,3804.37 v1@3007.72,3770.07 ; v1(3000.76,3769.37) 3000.76,3820.63 v1(3030.76,3850.63) ; v1@3025.39,3855.12 3002.79,3822.66 v1@3035.25,3845.26 ; v1@3235.39,3540.12 3212.79,3507.66 v1@3245.25,3530.26 ; v1@3241.46,3528.67 3275.76,3535.63 v1@3241.46,3542.59 ; v1@3406.3,3454.45 3413.26,3488.75 v1@3420.22,3454.45
  BOTTOM w10: v4@600.9,193.33 610.76,165 ; v4(610.76,195) 610.76,165 ; v4@620.62,193.33 610.76,165 ; v1@817.46,669.54 850.76,694.37 ; v1(821.39,665) 850.76,694.37 ; v1@825.93,661.07 850.76,694.37 ; v3@841.81,869.08 850.76,826 v3@859.71,869.08 ; v3@844.02,875.97 875.76,905 ; v3@858.59,865.56 875.76,905 ; v1@888.17,135.22 847.61,141.2 v1@888.17,147.18 ; v1(888.61,141.2) 634.56,141.2 610.76,165 ; v1(888.61,367.15) 1007.04,367.15 ; v1@889.05,361.16 929.61,367.15 v1@889.05,373.13 ; v3@1021.38,340.22 1007.04,367.15 ; v3(1028.61,345.57) 1007.04,367.15 ; v3@1033.97,352.8 1007.04,367.15 ; v1@1087.64,872.51 1063.61,905 ; v1(1092.19,876.43) 1063.61,905 ; v1@1096.1,880.97 1063.61,905 ; v3(1418.61,525.57) 1578.73,525.57 v1(1613.73,560.57) 1581.52,528.36 ; v3@1419.53,516.62 1462.61,525.57 v3@1419.53,534.52 ; v1@1609.22,564.53 1581.52,528.36 ; v1@1617.69,556.06 1581.52,528.36 ; v1(1705.76,3715) 1876.26,3715 v3(1883.61,3707.64) 1836.77,3715 ; v1@1706.2,3709.02 1746.76,3715 v1@1706.2,3720.98 ; v3@1881.38,3698.92 1836.77,3715 ; v3@1884.16,3716.63 1836.77,3715 ; v1@1976.81,3620.49 2012.97,3592.79 v1@1985.27,3628.95 ; v1(1980.76,3625) 2045.76,3560 v1(2050.76,3560) 2016.17,3589.59 ; v1@2046.57,3555.71 2016.17,3589.59 ; v1@2054.35,3564.81 2016.17,3589.59 ; v1(2218.61,4012.64) 2328.12,4012.64 v1(2330.76,4010) ; v1@2219.05,4006.66 2259.61,4012.64 v1@2219.05,4018.63 ; v1@2821.85,4179.55 2858.24,4206.85 ; v1@2830.23,4171 2858.24,4206.85 ; v1@2886.88,4243.95 2859.18,4207.79 v1@2895.34,4235.49 ; v1(2891.39,4240) 2826.39,4175 v1(2825.76,4175) 2858.24,4206.85 ; 850.76,694.37 v3(850.76,870) ; v3(850.76,870) 875.76,905 ; v3(850.76,870) 850.76,880 875.76,905 ; 875.76,905 1063.61,905
  BOTTOM w20: v1(1381.39,4330) 1545.76,4330 v1(1560.76,4315) ; v1(2206.19,610.43) 2420.33,610.43 ; v1(2420.76,525) 2420.76,610.87 v1(2420.76,735)
  BOTTOM w30: 293.28,4207.85 v4(185.76,4215) 192.91,4207.85 v6(480.31,4207.85) ; v4(935.76,3590) 935.76,3925 1018.4,4007.64 v1(1480.76,4007.64) 1638.61,4007.64 ; v3(1438.61,3020.57) 1438.61,3227.85 ; 1545.21,4007.64 v5(1653.61,4022.64) ; 2365.76,1066.24 v3(2368.61,1170.57) 2365.76,1167.72 2365.76,790 v1(2420.76,735) ; J3.14@3595.13,2361.01 J3.13@3516.39,2361.01 J3.11@3516.39,2439.75 J3.12@3595.13,2439.75 ; 1438.61,3227.85 v4(1465.76,3245) 1460.76,3250 1438.61,3227.85 ; 1638.61,4007.64 v5(1653.61,4022.64) ; 1638.61,4007.64 v5(1653.61,4022.64)
  BOTTOM w50: 3425.76,4160 v6(3600.76,4160) 3350.76,4160 ; 3290.76,4220 v6(3290.76,4260) ; 3290.76,4220 v6(3290.76,4260) ; 3290.76,4220 3350.76,4160 ; v6(3290.76,4260) 3350.76,4160 ; v3(1433.61,2905.57) v3(1553.61,2915.57) 1543.61,2905.57 v3(1433.61,2905.57)
  other v2: 1278.61,435.57 1278.61,580.57
  other v3: 2368.61,1250.57 1978.61,2710.57 1553.61,2800.57 1668.61,2920.57 2323.61,2930.57 2328.61,2990.57 2718.61,3015.57
  other v5: 2393.61,1470.57 2873.61,1775.57 613.61,2010.57
GPC1_1: CON13.7 U9.38 | length 4246.2
  TOP w6: 1430.76,2432.72 1540.76,2542.72 ; v2@1532.98,2558.15 1540.76,2542.72 ; v2@1548.54,2558.15 1540.76,2542.72 ; 1540.76,2542.72 v2(1540.76,2560) 1540.76,2542.72
  TOP w7: 1430.76,2432.72 1430.76,1701.26 1324.26,1594.76 1324.26,1301.5 1345.19,1280.57 1448.61,1280.57 1464.61,1296.57 2177.61,1296.57 2192.39,1281.8 ; v1@1451.03,3440.82 1481.61,3460.85 v1@1461.58,3430.27 ; v1(1455.76,3435) 1485.26,3464.5 1602.08,3464.5 1703.14,3565.57 U9.38@1703.14,3650 ; 1703.14,3596.5 U9.38@1703.14,3623.5 ; CON13.7@2192.39,1237.81 2192.39,1281.8 ; CON13.7@2192.39,1260.31 2192.39,1281.8
  BOTTOM w6: v1@1452.97,3442.5 1420.24,3426.07 ; v1@1456.85,3427.07 1420.24,3426.07 ; v2@1532.84,2561.1 1540.76,2589 v2@1548.68,2561.1 ; v2(1540.76,2560) 1540.76,2613.42 1173.61,2980.57 1173.61,3180.98 1174.76,3182.13 1174.76,3197.87 1173.61,3199.02 1173.61,3268.2 1187.26,3281.85 1187.26,3324.22 1289.11,3426.07 1446.83,3426.07 v1(1455.76,3435) 1420.24,3426.07
GPS33_EN: CON12.55
GPS_32K: CON10.60
GPS_RST: CON12.61 U9.46 | length 2183
  TOP w6: v1@1482.99,3366.9 1490.76,3381.87 ; v1(1490.76,3365) 1490.76,3381.87 ; v1@1498.53,3366.9 1490.76,3381.87 ; v2@1650.79,2662.26 1658.61,2679.57 ; v2(1658.61,2660.57) 1658.61,2679.57 ; 1660.9,2814.36 CON12.61@1660.9,2837.36 ; CON12.61@1660.9,2859.86 1660.9,2732.86 1653.61,2725.57 1653.61,2684.57 1658.61,2679.57 ; v2@1666.43,2662.26 1658.61,2679.57 ; 1860.63,3599.5 U9.46@1860.63,3623.5 ; U9.46@1860.63,3650 1860.63,3539.87 1845.76,3525 1710.76,3525 1616.76,3431 1539.89,3431 1490.76,3381.87
  BOTTOM w6: v1@1487.33,3369 1312.04,3369 1228.61,3285.57 1228.61,3000.57 1568.61,2660.57 v2(1658.61,2660.57) ; v1@1488.66,3357.28 1460.88,3369 ; v1(1490.76,3365) 1460.88,3369 ; v1@1490.76,3373 1460.88,3369 ; v2@1657.51,2652.65 1629.61,2660.57 v2@1657.51,2668.49
GPS_RXD: CON12.57 U9.37 | length 2048.3
  TOP w6: v1(1440.76,3350) 1430.76,3360 1430.76,3436.87 1469.89,3476 1597.32,3476 1683.45,3562.14 U9.37@1683.45,3650 ; 1683.45,3599.5 U9.37@1683.45,3623.5 ; v2@1692.35,2661.67 1700.27,2689.57 v2@1708.19,2661.67 ; v2(1700.27,2660.57) CON12.57@1700.27,2859.86 ; 1700.27,2814.36 CON12.57@1700.27,2837.36
  BOTTOM w6: v1@1434.08,3351 1319.04,3351 1243.61,3275.57 1243.61,3010.57 1573.61,2680.57 1680.27,2680.57 ; v1@1439.39,3342.12 1411.67,3351 ; v1@1439.93,3357.96 1411.67,3351 ; v1(1440.76,3350) 1411.67,3351 ; v2@1693.87,2655.77 1680.27,2680.57 ; v2@1705.07,2666.97 1680.27,2680.57 ; 1680.27,2680.57 v2(1700.27,2660.57) 1680.27,2680.57
GPS_SYNC: CON12.64
GPS_TXD: CON12.59 U9.33 | length 1894.1
  TOP w6: v2@1670.79,2717.26 1678.61,2734.57 ; v2(1678.61,2715.57) 1678.61,2734.57 ; 1680.58,2814.36 CON12.59@1680.58,2837.36 ; CON12.59@1680.58,2859.86 1680.58,2736.53 1678.61,2734.57 ; v2@1686.43,2717.26 1678.61,2734.57
  TOP w10: v1@1379.78,3325.44 1385.76,3366 v1@1391.74,3325.44 ; v1@1380.76,3320 v1(1385.76,3325) 1385.76,3425.81 1459.95,3500 1560.76,3500 1604.71,3543.95 U9.33@1604.71,3650 ; 1604.71,3587.5 U9.33@1604.71,3623.5
  BOTTOM w6: v1@1379.14,3320.51 1370.76,3340 ; v1@1390.25,3331.62 1370.76,3340 ; v2@1672.21,2720.37 1658.61,2695.57 ; v2(1678.61,2715.57) 1658.61,2695.57 ; v2@1683.41,2709.17 1658.61,2695.57 ; 1370.76,3340 v1(1385.76,3325) 1370.76,3340 ; 1370.76,3340 1333.04,3340 1263.61,3270.57 1263.61,3015.57 1583.61,2695.57 1658.61,2695.57
GPX0_0: CON13.6
GYRO_INT: CON10.55
HDMI_HPD: CON11.21
HDMI_IIC_EN: CON11.23
HOOK_DET: CON10.50
HUB_CONNECT: CON11.77
HUB_INT_N: CON11.75
HUB_RESET: CON11.58
I2C_SCL0: CON11.20
I2C_SCL1: CON10.75
I2C_SCL5: CON10.74
I2C_SCL6: CON11.43 U9.40 | length 3978.8
  TOP w6: U9.40@1742.52,3650 1742.52,3726.76 1780.76,3765 1900.76,3765 1965.76,3700 ; U9.40@1742.52,3676.5 1742.52,3700.5 ; v1@1989.48,3692.1 1965.76,3700 ; v1@1989.48,3707.9 1965.76,3700 ; v2(2538.61,2005.57) v2(2693.61,2005.57) ; v2@2539.72,1997.65 2567.61,2005.57 v2@2539.72,2013.49 ; v2@2692.51,1997.65 2664.61,2005.57 v2@2692.51,2013.49 ; 1965.76,3700 v1(1990.76,3700) 1965.76,3700
  TOP w8: CON11.43@2934.52,2078.36 3000.82,2078.36 v2(3063.61,2015.57) ; CON11.43@2957.02,2078.36 2986.02,2078.36
  BOTTOM w6: v1(1990.76,3700) 2101.32,3700 2214.32,3813 2469.78,3813 2538.61,3744.16 v2(2538.61,2005.57) ; v1@1991.86,3692.08 2019.76,3700 v1@1991.86,3707.92 ; v2@2530.69,2006.67 2538.61,2034.57 v2@2546.54,2006.67 ; v2@2688.67,1999.28 2717.34,1981.84 v2@2699.9,2010.51 ; v2(2693.61,2005.57) 2738.61,1960.57 3008.61,1960.57 v2(3063.61,2015.57) 3039.89,1991.84 ; v2@3057.32,2020.51 3039.89,1991.84 ; v2@3068.56,2009.28 3039.89,1991.84
I2C_SCL7: CON11.38 R28.1 U1.21 | length 4670.8
  TOP w6: CON11.38@2816.4,2137.42 2848.61,2137.42 ; CON11.38@2838.9,2137.42 2848.61,2137.42 ; v2@2867.21,2195.37 2853.61,2170.57 ; v2@2878.41,2184.17 2853.61,2170.57 ; 2848.61,2137.42 2853.61,2142.42 2853.61,2170.57 ; 2853.61,2170.57 v2(2873.61,2190.57) 2853.61,2170.57
  TOP w10: R28.1@2204.63,423 2264.01,430.16 ; R28.1@2206.19,408.75 2227.6,430.16 ; R28.1@2215.06,395.79 2264.01,430.16 ; 2264.24,430.16 U1.21@2299.16,430.16 ; U1.21@2348.38,430.16 2383.3,430.16 ; v1@2479.07,445.76 2436.45,430.16 ; v1@2481.67,434.07 2436.45,430.16 ; R28.1@2208.16,408.75 2227.6,430.16 ; R28.1@2208.16,408.75 2264.01,430.16 ; R28.1@2208.16,408.75 2227.6,430.16 ; 2227.6,430.16 2221.18,401.96 2227.6,430.16 ; 2227.6,430.16 2200.15,421.06 2227.6,430.16 ; 2227.6,430.16 U1.21@2323.77,430.16 2470.92,430.16 v1(2480.76,440) 2436.45,430.16
  BOTTOM w10: v1@2476.81,435.49 2512.97,407.79 v1@2485.27,443.95 ; v1(2480.76,440) 2525.76,395 2525.76,290 2580.76,235 3250.76,235 3290.76,275 3290.76,1882.43 3411.76,2003.43 3411.76,2184 3320.76,2275 2958.04,2275 v2(2873.61,2190.57)
I2C_SDA0: CON11.19
I2C_SDA1: CON10.76
I2C_SDA5: CON10.72
I2C_SDA6: CON11.45 U9.32 | length 4444.5
  TOP w6: v1(1510.76,3535) 1550.76,3535 1585.03,3569.28 U9.32@1585.03,3650 ; v1@1511.86,3527.08 1539.76,3535 v1@1511.86,3542.92 ; 1585.03,3599.5 U9.32@1585.03,3623.5 ; v2(2560.61,2035.57) 2676.33,2035.57 v2(2685.76,2045) 2653.8,2035.57 ; v2@2561.72,2027.65 2589.61,2035.57 v2@2561.72,2043.49 ; v2@2682.59,2052.35 2653.8,2035.57 ; v2@2687.09,2037.11 2653.8,2035.57
  TOP w8: CON11.45@2934.52,2058.69 2990.5,2058.69 v2(3028.61,2020.57) 3000.64,2048.54 ; CON11.45@2957.02,2058.69 2986.02,2058.69 ; v2@3023.25,2016.08 3000.64,2048.54 ; v2@3033.11,2025.94 3000.64,2048.54
  BOTTOM w6: v1(1510.76,3535) 1885.76,3535 1926.76,3576 1926.76,3697.87 1952.89,3724 2109.76,3724 2209.76,3824 2474.33,3824 2560.61,3737.72 v2(2560.61,2035.57) ; v1@1511.86,3527.08 1539.76,3535 v1@1511.86,3542.92 ; v2@2552.69,2036.67 2560.61,2064.57 v2@2568.54,2036.67 ; v2@2680.82,2038.71 2709.49,2021.27 v2@2692.05,2049.94 ; v2(2685.76,2045) 2750.19,1980.57 2988.61,1980.57 v2(3028.61,2020.57) 3004.89,1996.84 ; v2@3022.32,2025.51 3004.89,1996.84 ; v2@3033.56,2014.28 3004.89,1996.84
I2C_SDA7: CON11.37 R27.1 U1.22 | length 4525.5
  TOP w6: v2(2873.61,2220.57) 2893.61,2200.57 2893.61,2141.83 2898.02,2137.42 ; CON11.37@2912.02,2137.42 2898.02,2137.42 ; CON11.37@2934.52,2137.42 2898.02,2137.42
  TOP w10: R27.1@2198.93,351.42 2247.09,380.9 ; R27.1@2206.19,340 2276.67,410.47 ; R27.1@2208.16,340 2247.09,380.9 ; R27.1@2220.02,331.34 2247.09,380.9 ; U1.22@2299.16,410.47 2276.67,410.47 ; U1.22@2348.38,410.47 2383.3,410.47 ; v1@2491.1,386.22 2475.29,410.47 ; v1(2495.76,390) 2475.29,410.47 ; v1@2499.54,394.66 2475.29,410.47 ; 2276.67,410.47 U1.22@2323.77,410.47 2475.29,410.47
  BOTTOM w10: v1@2489.78,389.56 2495.76,349 ; v1@2501.74,389.56 2495.76,349 ; v2@2869.66,2225.08 2905.83,2252.78 v2@2878.13,2216.62 ; v2(2873.61,2220.57) 2943.04,2290 3326.97,2290 3428.76,2188.21 3428.76,1999.21 3305.76,1876.21 3305.76,263.79 3261.97,220 2570.76,220 2495.76,295 v1(2495.76,390) 2495.76,349
ISP_SCL: CON11.3
ISP_SDA: CON11.4
KP_COL0: CON11.54 R1.2 | length 2977.4
  TOP w6: v2(2693.61,1930.57) 2710.84,1930.57 ; v2@2695.47,1922.79 2710.84,1930.57 ; v2@2695.47,1938.35 2710.84,1930.57 ; 2770.9,1979.94 CON11.54@2793.9,1979.94 ; CON11.54@2816.4,1979.94 2760.22,1979.94 2710.84,1930.57 ; v2@2831.27,2763.38 2850.76,2755 ; v2(2835.76,2770) 2850.76,2755 ; v2@2842.38,2774.49 2850.76,2755 ; v4@3503.97,2987.74 3515.76,2958.13 ; v4@3509.79,2989.44 3515.76,2958.13 ; v4@3521.73,2989.44 3515.76,2958.13 ; v4@3527.55,2987.74 3515.76,2958.13 ; 2850.76,2755 3312.63,2755 3515.76,2958.13 ; 3515.76,2958.13 v4(3515.76,2990) 3515.76,2958.13
  BOTTOM w6: v2@2685.79,1932.26 2693.61,1949.57 ; v2(2693.61,1930.57) 2693.61,1949.57 ; v2@2701.43,1932.26 2693.61,1949.57 ; v2@2827.78,2769.49 2833.61,2740.78 ; v2@2843.58,2768.33 2833.61,2740.78 ; v4(3410.76,3375) 3445.76,3375 3515.76,3305 v4(3515.76,2990) ; v4@3411.31,3369.02 3443.76,3375 ; v4@3411.31,3380.98 3443.76,3375 ; v4@3412.94,3363.2 3443.76,3375 ; v4@3412.94,3386.8 3443.76,3375 ; v4@3503.96,2992.18 3515.76,3023 ; v4@3509.78,2990.55 3515.76,3023 ; v4@3521.74,2990.55 3515.76,3023 ; v4@3527.56,2992.18 3515.76,3023 ; 2693.61,1949.57 2650.76,1992.42 2650.76,2447.72 2833.61,2630.57 2833.61,2767.85 v2(2835.76,2770) 2833.61,2740.78
KP_ROW0: CON10.56
KP_ROW1: CON10.58
LCD_DEN: CON12.21 U12.30 | length 2216.3
  TOP w6: v2@2039.27,2787.29 2057.05,2794.01 ; v2(2043.61,2780.57) 2057.05,2794.01 ; v2@2050.33,2776.23 2057.05,2794.01 ; CON12.21@2054.6,2837.36 2054.6,2823.36 ; CON12.21@2054.6,2859.86 2054.6,2823.36 ; v2(2116.61,3125.57) 2158.61,3125.57 2368.36,3335.31 2590.37,3335.31 2632.68,3377.63 2632.68,3723.08 ; v2@2117.72,3117.65 2145.61,3125.57 v2@2117.72,3133.49 ; 2599.68,3900.04 U12.30@2599.68,3923.35 ; U12.30@2599.68,3950.52 2599.68,3891.08 ; v1@2603.85,3875.97 2599.68,3891.08 ; v1(2610.76,3880) 2599.68,3891.08 ; v1@2611.13,3733.48 2632.68,3723.08 ; v1@2614.79,3886.91 2599.68,3891.08 ; v1(2615.76,3740) 2632.68,3723.08 ; v1@2622.28,3744.63 2632.68,3723.08 ; 2054.6,2823.36 2057.05,2820.91 2057.05,2794.01
  BOTTOM w6: v2@2039.27,2787.29 2057.05,2794.01 ; v2(2043.61,2780.57) 2057.05,2794.01 ; v2@2050.33,2776.23 2057.05,2794.01 ; v2@2110.32,3130.51 2092.89,3101.84 ; v2@2121.56,3119.28 2092.89,3101.84 ; v1@2604.32,3884.75 2591.76,3861 ; v1@2609.47,3735.06 2592.03,3763.73 ; v1@2615.51,3873.56 2591.76,3861 ; v1@2620.7,3746.29 2592.03,3763.73 ; 2057.05,2794.01 2057.05,3066.01 v2(2116.61,3125.57) 2092.89,3101.84 ; 2591.76,3861 v1(2610.76,3880) 2591.76,3861 ; 2591.76,3861 2591.76,3764 v1(2615.76,3740) 2592.03,3763.73
LCD_HSYNC: CON12.18 U12.27 | length 1401.5
  TOP w6: v2@2087.79,2920.26 2095.61,2937.57 ; CON12.18@2093.97,2955.48 2093.97,2939.21 ; CON12.18@2093.97,2977.98 2093.97,2939.21 ; v2(2095.61,2918.57) 2095.61,2937.57 ; v2@2103.43,2920.26 2095.61,2937.57 ; v2@2208.67,3251.86 2237.34,3269.3 v2@2219.9,3240.63 ; v2(2213.61,3245.57) 2325.36,3357.31 2573.07,3357.31 2599.68,3383.92 U12.27@2599.68,3645.4 ; 2599.68,3594.92 U12.27@2599.68,3618.23 ; 2093.97,2939.21 2095.61,2937.57
  BOTTOM w6: v2@2087.69,2919.67 2095.61,2947.57 v2@2103.54,2919.67 ; v2(2095.61,2918.57) 2095.61,3037.57 2213.61,3155.57 v2(2213.61,3245.57) ; v2@2205.69,3244.47 2213.61,3216.57 v2@2221.54,3244.47
LCD_PWDN: CON12.46 U12.32 | length 2222.7
  TOP w6: v2@1729.05,3267.82 1736.97,3239.93 ; v2(1738.61,3325.57) 1811.64,3325.57 1812.08,3325.13 1960.89,3325.13 v1(2150.76,3515) 2127.03,3491.27 ; v2@1744.89,3267.82 1736.97,3239.93 ; CON12.46@1818.38,2977.98 1818.38,3100.8 1736.97,3182.21 v2(1736.97,3268.93) 1736.97,3239.93 ; CON12.46@1818.38,3000.48 1818.38,3023.48 ; v1@2144.47,3519.94 2127.03,3491.27 ; v1@2155.7,3508.71 2127.03,3491.27 ; v1(2405.76,3765) 2500.76,3765 2525.76,3790 ; v1@2517.86,3813.72 2525.76,3790 ; v1(2525.76,3815) 2525.76,3790 ; v1@2533.66,3813.72 2525.76,3790 ; v1@2544.49,3899.5 2560.31,3904.33 ; v1(2548.61,3892.64) 2560.31,3904.33 ; v1@2555.47,3888.52 2560.31,3904.33 ; U12.32@2560.31,3923.35 2560.31,3904.33 ; U12.32@2560.31,3950.52 2560.31,3904.33
  BOTTOM w6: v2@1729.05,3270.03 1736.97,3297.93 v2@1744.89,3270.03 ; v2@1730.79,3323.89 1738.61,3306.57 ; v2(1736.97,3268.93) 1736.97,3304.93 1738.61,3306.57 ; v2(1738.61,3325.57) 1738.61,3306.57 ; v2@1746.43,3323.89 1738.61,3306.57 ; v1(2150.76,3515) 2210.76,3515 2305.76,3610 2360.76,3610 2405.76,3655 v1(2405.76,3765) ; v1@2151.86,3507.08 2179.76,3515 v1@2151.86,3522.92 ; v1@2397.84,3763.9 2405.76,3736 v1@2413.68,3763.9 ; v1(2525.76,3815) 2540.76,3815 ; v1@2527.89,3807.29 2540.76,3815 ; v1@2527.89,3822.71 2540.76,3815 ; v1@2540.69,3891.54 2548.61,3863.64 v1@2556.54,3891.54 ; v1(2548.61,3892.64) 2548.61,3822.85 2540.76,3815
LCD_SCL: R50.2 U5.2 | length 1072.2
  TOP w10: U5.2@2912.18,4099.69 2881.07,4099.69 ; U5.2@2924.97,4099.69 2881.07,4099.69 ; R50.2@3056.8,3762.84 3050.76,3805 ; R50.2@3070.76,3765.43 3070.76,3785 3050.76,3805 ; R50.2@3070.76,3767.4 3050.76,3805 ; R50.2@3082.34,3776.43 3050.76,3805 ; 2881.07,4099.69 2855.45,4125.31 2855.45,4201.23 2841.67,4215 2800.76,4215 2785.76,4200 2785.76,3860 2815.76,3830 2891.97,3830 2916.97,3805 3050.76,3805
LCD_SDA: R49.2 U5.1 | length 817.7
  TOP w10: U5.1@2912.18,4119.37 2896.39,4119.37 ; U5.1@2924.97,4119.37 2896.39,4119.37 ; R49.2@2930.76,3765.43 2930.76,3770 2885.76,3815 2809.55,3815 2770.76,3853.79 2770.76,4210 2790.76,4230 2850.76,4230 2863.67,4217.09 2863.67,4216.17 2870.76,4209.09 2870.76,4145 2896.39,4119.37
LCD_VD0: CON12.23
LCD_VD1: CON12.22
LCD_VD2: CON12.25 U12.15 | length 1611.6
  TOP w6: v2@2008.79,2719.26 2016.61,2736.57 ; 2015.23,2814.36 CON12.25@2015.23,2837.36 ; CON12.25@2015.23,2859.86 2015.23,2737.95 2016.61,2736.57 ; v2(2016.61,2717.57) 2016.61,2736.57 ; v2@2024.43,2719.26 2016.61,2736.57
  TOP w10: v1@2270.76,3495 v1(2275.76,3495) 2363.46,3582.7 U12.15@2363.46,3645.4 ; v1@2271.81,3499.51 2307.97,3527.21 v1@2280.27,3491.05 ; 2363.46,3582.92 U12.15@2363.46,3618.23
  BOTTOM w6: v2(2016.61,2717.57) 2065.61,2717.57 2118.61,2770.57 2118.61,3033.54 2233.61,3148.54 2233.61,3427.15 2220.76,3440 2220.76,3475 2240.76,3495 v1(2275.76,3495) 2246.76,3495 ; v2@2017.72,2709.65 2045.61,2717.57 v2@2017.72,2725.49 ; v1@2274.66,3487.08 2246.76,3495 ; v1@2274.66,3502.92 2246.76,3495
LCD_VD3: CON12.24 U12.19 | length 1112.9
  TOP w6: CON12.24@2034.91,2977.98 2034.91,3135.87 2082.61,3183.57 2319.61,3420.57 2346.33,3420.57 v1(2370.76,3445) ; CON12.24@2034.91,3000.48 2034.91,3023.48 ; v1(2355.76,3545) 2430.76,3545 2442.2,3556.44 U12.19@2442.2,3645.4 ; v1@2356.86,3537.08 2384.76,3545 v1@2356.86,3552.92 ; 2442.2,3594.92 U12.19@2442.2,3618.23
  BOTTOM w6: v1@2351.27,3538.38 2370.76,3530 ; v1(2355.76,3545) 2370.76,3530 ; v1@2362.38,3549.49 2370.76,3530 ; v1@2362.84,3446.1 2370.76,3474 v1@2378.68,3446.1 ; v1(2370.76,3445) 2370.76,3530